# Altium PCB Switch_board_right_PCB.PcbDoc
Units mil, origin at the board's own origin, x right, y up, seen from the top; angles counter-clockwise.
Board outline 2086.61 x 4330.71 mil, 2 copper layers (Top Layer, Bottom Layer); 19 components, 12 nets, 57 pads, 18 vias.
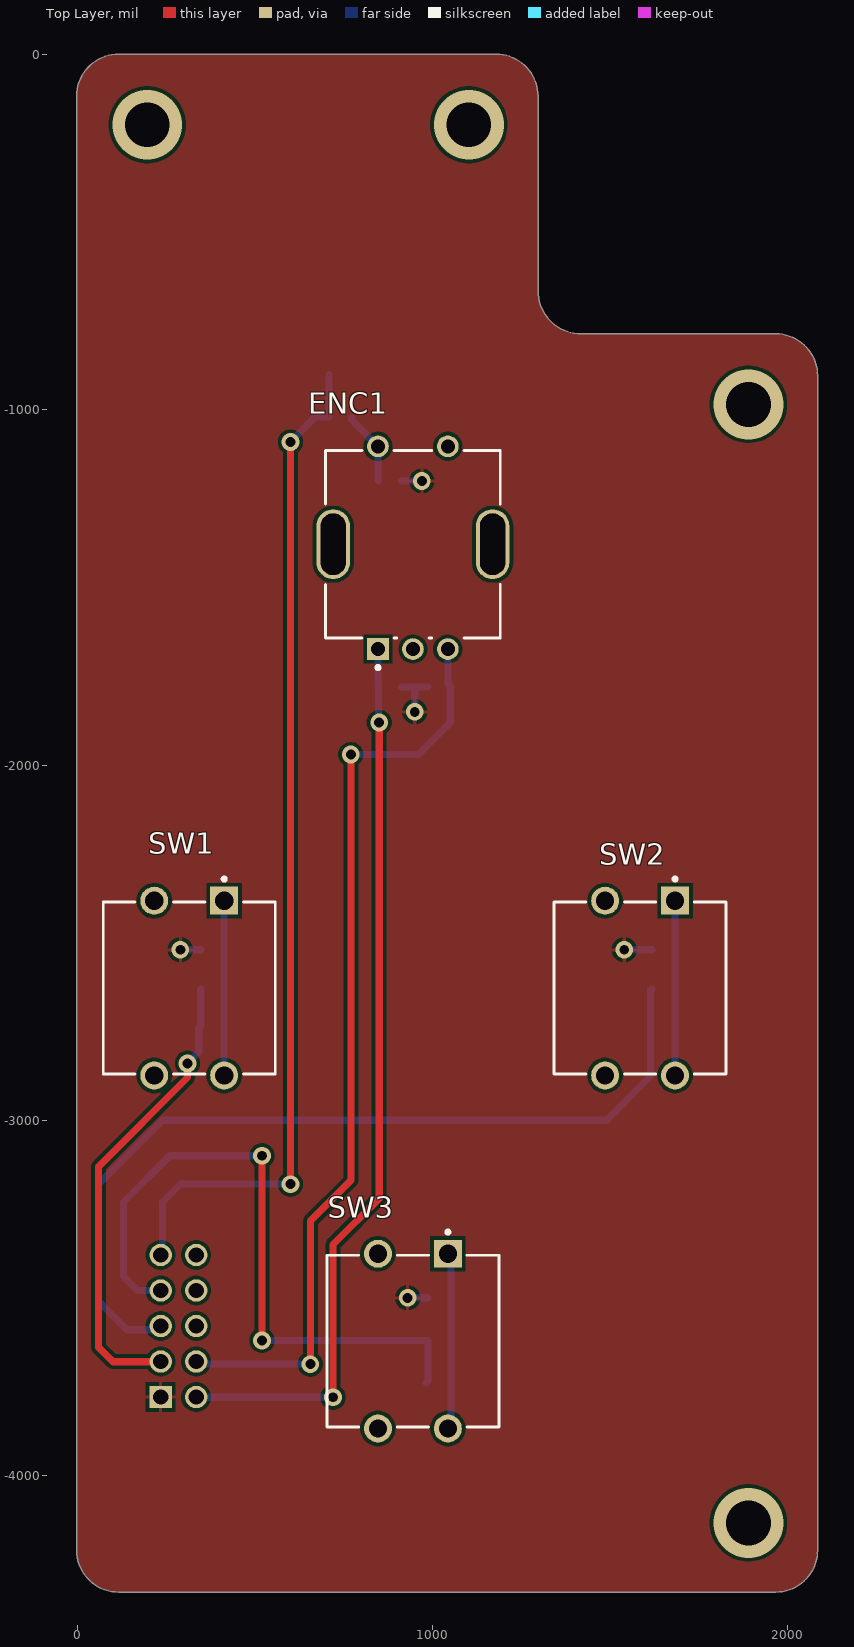
[diagram p0: Top Layer view]
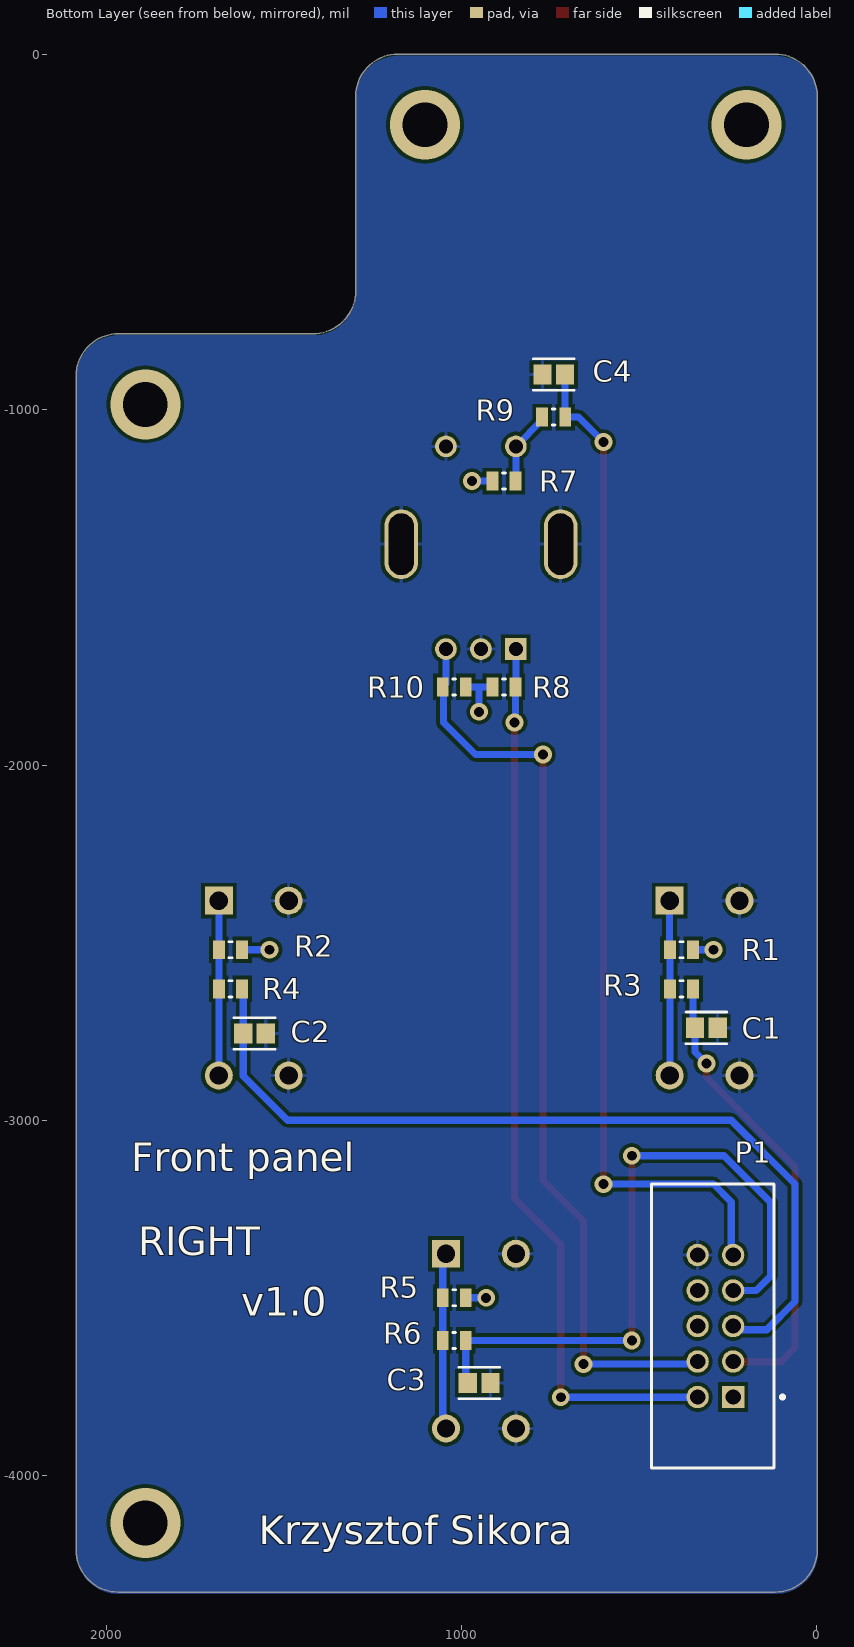
[diagram p1: Bottom Layer view, seen from below]
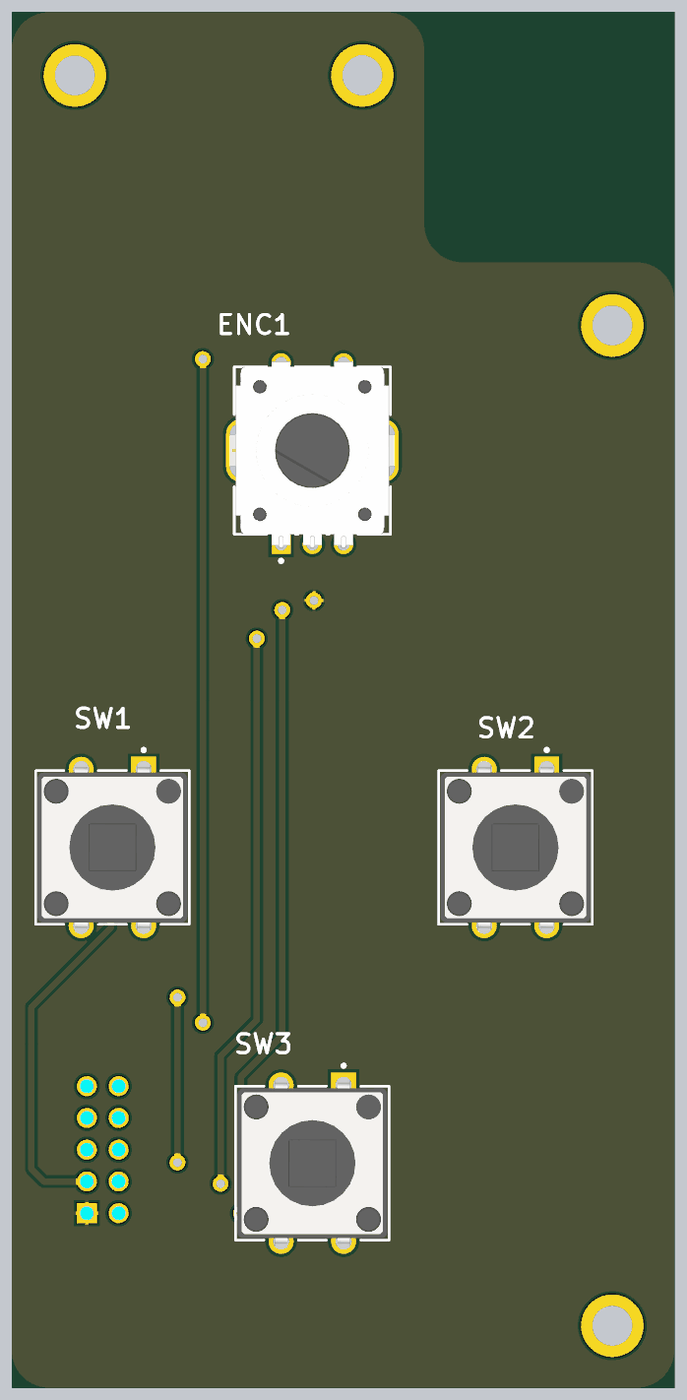
[diagram p2: 3D render of the assembled board from above, using the file's embedded part models]

## Layer stack, top to bottom
Top Solder: solder mask 0.4, Solder Resist, Dk 3.5
Top Layer: signal copper 1.4
Dielectric 1: dielectric 12.6, FR-4, Dk 4.8
Bottom Layer: signal copper 1.4
Bottom Solder: solder mask 0.4, Solder Resist, Dk 3.5

## Board outline
-2.05,-4210.71 -2.05,-116.22 cw(c116.06,-116.22) 116.06,1.89 1179.06,1.89 cw(c1179.06,-116.22) 1297.17,-116.22 1297.17,-664.06 ccw(c1418.61,-664.06) 1418.61,-785.51 1966.46,-785.51 cw(c1966.46,-903.62) 2084.57,-903.62 2084.57,-4210.71 cw(c1966.46,-4210.71) 1966.46,-4328.82 116.06,-4328.82 cw(c116.06,-4210.71)

## Design rules (kind name [scope] priority, off if disabled: settings)
Clearance Clearance_1 [OnMid vs OnMid] p1: gap=10 ignorepadtopadclearanceinfootprint=FALSE sourcerule=36 cellrowname=All cellrowtype=0 cellcolname=All cellcoltype=0 innerlayers=TRUE
Clearance Clearance_2 [(ExistsOnLayer('Top Layer') Or ExistsOnLayer('Bottom Layer')) vs (ExistsOnLayer('Top Layer') Or ExistsOnLayer('Bottom Layer'))] p2: gap=10 ignorepadtopadclearanceinfootprint=FALSE sourcerule=36 cellrowname=All cellrowtype=0 cellcolname=All cellcoltype=0 outerlayers=TRUE
Clearance [All] p3: gap=10 ignorepadtopadclearanceinfootprint=FALSE ismatrix=TRUE
PolygonConnect [All] p1: connectstyle=Relief reliefconductorwidth=10 reliefentries=4 polygonreliefangle="90 Angle" airgapwidth=10
RoutingVias [All] p1: holewidth=28 width=50 viastyle="Through Hole" minholewidth=28 minwidth=50 maxholewidth=28 maxwidth=50
SolderMaskExpansion [All] p1: expansion=4 istentingtop=FALSE
Width [All] p1: maxlimit=40 minlimit=10 preferedwidth=20 minimp=50.000000 maximp=50.000000 favimp=50.000000
30 further rules are at their usual default settings.

## Components (designator, comment, footprint, x,y, rotation, side; value= is the part's Value field where it differs from the comment)
C1 "100nF" FP-0805-L_2_01_0_2-W_1_25-IPC_B 310,-2740 r180 bottom
C2 "100nF" FP-0805-L_2_01_0_2-W_1_25-IPC_B 1582.45,-2755.91 r180 bottom
C3 "100nF" FP-0805-L_2_01_0_2-W_1_25-IPC_B 950,-3740 r180 bottom
C4 "100nF" FP-0805-L_2_01_0_2-W_1_25-IPC_B 740,-900 r0 bottom
ENC1 "PEC11R-4215F-S0024" FP-PEC11R-4215F-S0024-MFG 944.88,-1377.95 r0 top
P1 "30310-6002HB" 3M-30310-6002HB-10_V 284.65,-3579.53 r90 bottom
R1 "1k" RESC2013X50X30LL20T20 380,-2520 r180 bottom
R2 "1k" RESC2013X50X30LL20T20 1650,-2520 r180 bottom
R3 "1k" RESC2013X50X30LL20T20 380,-2630 r0 bottom
R4 "1k" RESC2013X50X30LL20T20 1650,-2630 r0 bottom
R5 "1k" RESC2013X50X30LL20T20 1020,-3500 r180 bottom
R6 "1k" RESC2013X50X30LL20T20 1020,-3620 r0 bottom
R7 "1k" RESC2013X50X30LL20T20 880,-1200 r0 bottom
R8 "1k" RESC2013X50X30LL20T20 880,-1780 r0 bottom
R9 "1k" RESC2013X50X30LL20T20 740,-1020 r180 bottom
R10 "1k" RESC2013X50X30LL20T20 1020,-1780 r180 bottom
SW1 "FSM103" FP-FSM103-MFG 314.96,-2627.95 r90 top
SW2 "FSM103" FP-FSM103-MFG 1584.65,-2627.95 r90 top
SW3 "FSM103" FP-FSM103-MFG 944.88,-3622.05 r90 top

## Footprints (in the part's own frame and the unit in brackets; to place one, negate y for a bottom-side part, rotate by r counter-clockwise, add the part's x,y. Pads: shape width x height; smd on the part's side, far side on the other; paste and mask are expansions set on the pad)
3M-30310-6002HB-10_V [mm] "CONN, 10-Leads, Body 20.3x8.4mm, Pitch 2.54mm"
  rect 1.6x1.6 hole 1.09: 1(-5.08,-1.27)
  round 1.6 hole 1.09: 2(-5.08,1.27) 3(-2.54,-1.27) 4(-2.54,1.27) 5(0,-1.27) 6(0,1.27) 7(2.54,-1.27) 8(2.54,1.27) 9(5.08,-1.27) 10(5.08,1.27)
  silkscreen extent -10.15,-4.92 10.15,4.58, body extent -10.15,-4.2 10.15,4.61, height 8.89
FP-0805-L_2_01_0_2-W_1_25-IPC_B [mil]
  rect 51.36x57.33 smd paste+0 mask+0: 1(-31.72,0) 2(31.72,0)
  silkscreen extent -57,-44 57,44, body extent -40,-25 40,25, height 55
FP-FSM103-MFG [mm]
  rect 2x2 hole 1.3 paste-2539.97 mask+0: 1(6.25,-2.5)
  round 2 hole 1.3 paste-2539.97 mask+0: 2(-6.25,-2.5) 3(6.25,2.5) 4(-6.25,2.5)
  silkscreen extent -6.15,-6.15 7.92,6.15, body extent -7.35,-6.25 7.35,6.25, height 0.25
FP-PEC11R-4215F-S0024-MFG [mm]
  round 1.55 hole 1 paste-2539.97 mask+0: 1(-2.5,7) 2(2.5,7) B(2.5,-7.5) C(0,-7.5)
  rrect100% 2.4x5 hole 4.4 slot 1.8 at 0 deg paste-2539.97 mask+0: 3(-5.7,0) 4(5.7,0)
  rect 1.55x1.55 hole 1 paste-2539.97 mask+0: A(-2.5,-7.5)
  silkscreen extent -6.25,-8.95 6.25,6.7, body extent -7,-8.37 7,7.88, height 0.25
RESC2013X50X30LL20T20 [mm] "Chip Resistor, 2-Leads, Body 2.00x1.25mm, IPC High Density"
  rect 0.85x1.35 smd: 1(-0.825,0) 2(0.825,0)
  silkscreen extent -0.1,-0.58 0.1,0.58, body extent -1.1,-0.72 1.1,0.72, height 0.5

## Part data
C1 C2 C3 C4: library part CMP-2007-04174-2, "General Purpose Ceramic Capacitor, 0805, 100nF, 10%, X7R, 15%, 100V", Case Code (Imperial)=0805, Case Code (Metric)=2012, Dielectric=X7R, Dielectric Material=Ceramic, Max Operating Temperature=125°C, Min Operating Temperature=-55°C, Package Quantity=2000, Tolerance=10%, Voltage=100V, Capacitance=100nF, Case/Package=0805, Construction=Flat, Contact Plating=Tin, Depth=1.25mm, Height=1.4mm, Lead Free="Lead Free", Length=2.01mm, Mount="Surface Mount", Number of Pins=2, Packaging="Tape and Reel", Radiation Hardening=No, REACH SVHC="No SVHC", RoHS Compliant=Yes, Series=-, Termination=SMD/SMT, Thickness=0.055inch, Voltage Rating=100V, Voltage Rating (DC)=100V, Width=0.049inch
ENC1: library part CMP-1747-00012-2, "ROTARY ENCODER MECHANICAL 24PPR", Max Operating Temperature=70°C, Min Operating Temperature=-30°C, Package Quantity=150, Built in Switch=Yes, Detent=Yes, Encoder Type=Mechanical, Height=13.4mm, Hole Diameter=1.8mm, Length=21.5mm, Mount="Through Hole", Number of Channels=2, Orientation=Vertical, Output Type=Quadrature, Packaging=Bulk, Pulses per Revolution=24, Radiation Hardening=No, REACH SVHC="No SVHC", RoHS Compliant=Yes, Series=PEC11R, Termination="PC Pins", Type=Mechanical, Width=12.5mm
P1: library part CMP-2000-05031-1, "Male Header, Pitch 2.54 mm, 2 x 5 Position, Height 9.3 mm, Tail Length 2.79 mm, -55 to 105 degC, RoHS, Bulk", Current Rating=1A, Manufacturer=3M, Brand=3MElectronicSolutionsDivision, Contact Gender=Pin(Male), Contact Material=Brass, Contact Plating=Gold, Datasheet URL=http://datasheet.octopart.com/30310-6002HB-3M-datasheet-11537585.pdf, Datasheet Version=Apr-12, Factory Pack Quantity=1000, Housing Material=Polyester, Manufacturer URL=http://www.3m.com/, Mating Post Length=5.99mm, Mounting Angle=Straight, Mounting Style=StraightPin, Number of Positions=10Position, Number of Rows=2Row, Packaging=Tray, Pitch=2.54mm, Product=Headers, Product Category=Headers&WireHousings, RoHS=Details, Row Spacing=2.54mm, Series=303, Termination Post Length=2.79mm, Termination Style=ThroughHole, Type=Shrouded
R1 R2 R3 R4 R5 R6 R7 R8 R9 R10: library part CMP-2001-04896-1, Manufacturer="Vishay Dale", Part Number=CRCW08050000Z0EA
SW1 SW2 SW3: library part CMP-03407-000037-1, "SWITCH TACTILE SPST-NO 0.05A 24V", Actuator Color=Black, Contact Current Rating=50mA, Contact Resistance=100mR, Max Operating Temperature=85°C, Max Voltage Rating (DC)=12V, Min Operating Temperature=-35°C, Operating Force=1.57N, Package Quantity=400, Voltage Rating=24V, Actuator Length=3.4mm, Actuator Material=Polyester, Contact Material=Brass, Contact Plating=Silver, Current Rating=50mA, Depth=14.1mm, Electrical Life=100000Cycles, Illumination Type=Non-Illuminated, Length=12mm, Max Current Rating=50mA, Mechanical Life=100000Cycles, Mount="Through Hole", Orientation=Straight, Packaging="Loose Piece", Radiation Hardening=No, RoHS Compliant=Yes, Series="FSM100 ~ 104", Switch Function=Off-Mom, Switch Travel=0.3mm, Termination="PC Pins", Throw Configuration=SPST, Type=Switch, Voltage Rating (DC)=12V, Width=12mm

## Via types
v1: diameter 50, hole 28, Top Layer to Bottom Layer, 14 vias
v2: diameter 196.85, hole 125.98, Top Layer to Bottom Layer, 4 vias

## Nets (pads, with @x,y where several pads share a name; then routed paths per layer and width w, separated by ;. In a path a pad name is that pad's centre, name@x,y a point inside that pad or via, vN(x,y) a via of type N, cw(c..) or ccw(c..) an arc to the next point about the centre after c; other vN are vias at no path point)
BtnENC: C4.1 P1.9 R9.2 | length 2879.3
  Top Layer w20: v1(600,-3180) v1(600,-1090)
  Bottom Layer w20: P1.9 240,-3374.17 240,-3230 290,-3180 v1(600,-3180) ; v1(600,-1090) 670,-1020 R9.2 708.28,-1019.24 C4.1
BtnLEFT_WHEEL: C1.1 P1.3 R3.1 | length 1320.5
  Top Layer w20: P1.3 234.17,-3680 100,-3680 60,-3640 60,-3130 310,-2880 v1(310,-2840)
  Bottom Layer w20: v1(310,-2840) 341.72,-2808.28 C1.1 347.52,-2734.2 R3.1
BtnLOAD_ON: C3.1 P1.7 R6.1 | length 1885.2
  Top Layer w20: v1(520,-3620) v1(520,-3100)
  Bottom Layer w20: P1.7 170.47,-3479.53 170,-3480 130,-3440 130,-3230 260,-3100 v1(520,-3100) ; v1(520,-3620) R6.1 987.52,-3734.2 C3.1
BtnRIGHT_WHEEL: C2.1 P1.5 R4.1 | length 2469.5
  Bottom Layer w20: P1.5 224.13,-3590.05 140.05,-3590.05 60,-3510 60,-3180 240,-3000 1490,-3000 1614.17,-2875.83 C2.1 1614.17,-2633.35 R4.1
EncA: ENC1.A P1.2 R8.1 | length 2547.6
  Top Layer w20: v1(720,-3780) 720,-3350 850,-3220 v1(850,-1880)
  Bottom Layer w20: P1.2 335.12,-3780 v1(720,-3780) ; ENC1.A 846.46,-1778.94 R8.1 847.52,-1877.52 v1(850,-1880)
EncB: ENC1.B P1.4 R10.1 | length 2617.3
  Top Layer w20: v1(655.94,-3686.87) 655.94,-3284.06 770,-3170 v1(770,-1970)
  Bottom Layer w20: P1.4 341.99,-3686.87 v1(655.94,-3686.87) ; v1(770,-1970) 960,-1970 1050,-1880 1050,-1782.48 R10.1 1043.31,-1770.83 ENC1.B
GND: C1.2 C2.2 C3.2 C4.2 ENC1.2 ENC1.3 ENC1.4 ENC1.C P1.10 SW1.3 SW1.4 SW2.3 SW2.4 SW3.3 SW3.4
NetENC1_1: ENC1.1 R7.1 R9.1 | length 211.1
  Bottom Layer w20: R9.1 772.48,-1028.39 ENC1.1 846.46,-1198.94 R7.1
NetR1_1: R1.1 R3.2 SW1.1 SW1.2 | length 492.9
  Bottom Layer w20: SW1.2 412.48,-2873.11 R3.2 R1.1 413.39,-2519.09 SW1.1
NetR2_1: R2.1 R4.2 SW2.1 SW2.2 | length 492.6
  Bottom Layer w20: SW2.2 1682.48,-2873.43 R4.2 R2.1 1682.48,-2382.48 SW2.1
NetR5_1: R5.1 R6.2 SW3.1 SW3.2 | length 499.7
  Bottom Layer w20: SW3.2 1052.48,-3858.94 R6.2 R5.1 1052.48,-3385.16 SW3.1
Vcc3_3: P1.1 R1.2 R2.2 R5.2 R7.2 R8.2 R10.2 | length 395.1
  Bottom Layer w20: v1(290,-2520) R1.2 ; R8.2 950,-1780 ; R7.2 v1(970,-1200) ; v1(930,-3500) R5.2 ; v1(950,-1850) 950,-1780 ; R10.2 950,-1780 ; v1(1540,-2520) R2.2
pads on no net: P1.6 P1.8
copper on no net:
  other v2: 1889.76,-4133.86 1889.76,-984.25 196.85,-196.85 1102.36,-196.85

## Polygon pours and split planes (outlines as drawn)
Vcc3_3 on Top Layer "VCC3_3_L01_P000" (solid, pour order 0): -2.05,-4210.71 -2.05,-116.22 cw(c116.06,-116.22) 116.06,1.89 1179.06,1.89 cw(c1179.06,-116.22) 1297.17,-116.22 1297.17,-664.06 ccw(c1418.61,-664.06) 1418.61,-785.51 1966.46,-785.51 cw(c1966.46,-903.62) 2084.57,-903.62 2084.57,-4210.71 cw(c1966.46,-4210.71) 1966.46,-4328.82 116.06,-4328.82 cw(c116.06,-4210.71)
GND on Bottom Layer "GND_L02_P001" (solid, pour order 1): -3.29,-4215.43 -3.29,-120.94 cw(c114.82,-120.94) 114.82,-2.83 1177.81,-2.83 cw(c1177.81,-120.94) 1295.92,-120.94 1295.92,-668.78 ccw(c1417.36,-668.78) 1417.36,-790.23 1965.21,-790.23 cw(c1965.21,-908.34) 2083.32,-908.34 2083.32,-4215.43 cw(c1965.21,-4215.43) 1965.21,-4333.54 114.82,-4333.54 cw(c114.82,-4215.43)

## Silkscreen, mask and mechanical layers (free items; w line width, h text height)
Bottom Overlay:
  text "Front panel" at 1930,-3143.34 h80
  text "RIGHT" at 1910,-3380 h80
  text "v1.0" at 1620,-3550 h80
  text "Krzysztof Sikora" at 1570,-4193.34 h80
Mechanical 1:
  the board outline again, w10